# Altium PCB Schémas suiveur ligne.PcbDoc
Units mm, origin at the board's own origin, x right, y up, seen from the top; angles counter-clockwise.
Board outline 36 x 51 mm, 2 copper layers (Top Layer, Bottom Layer); 21 components, 12 nets, 56 pads, 5 vias.
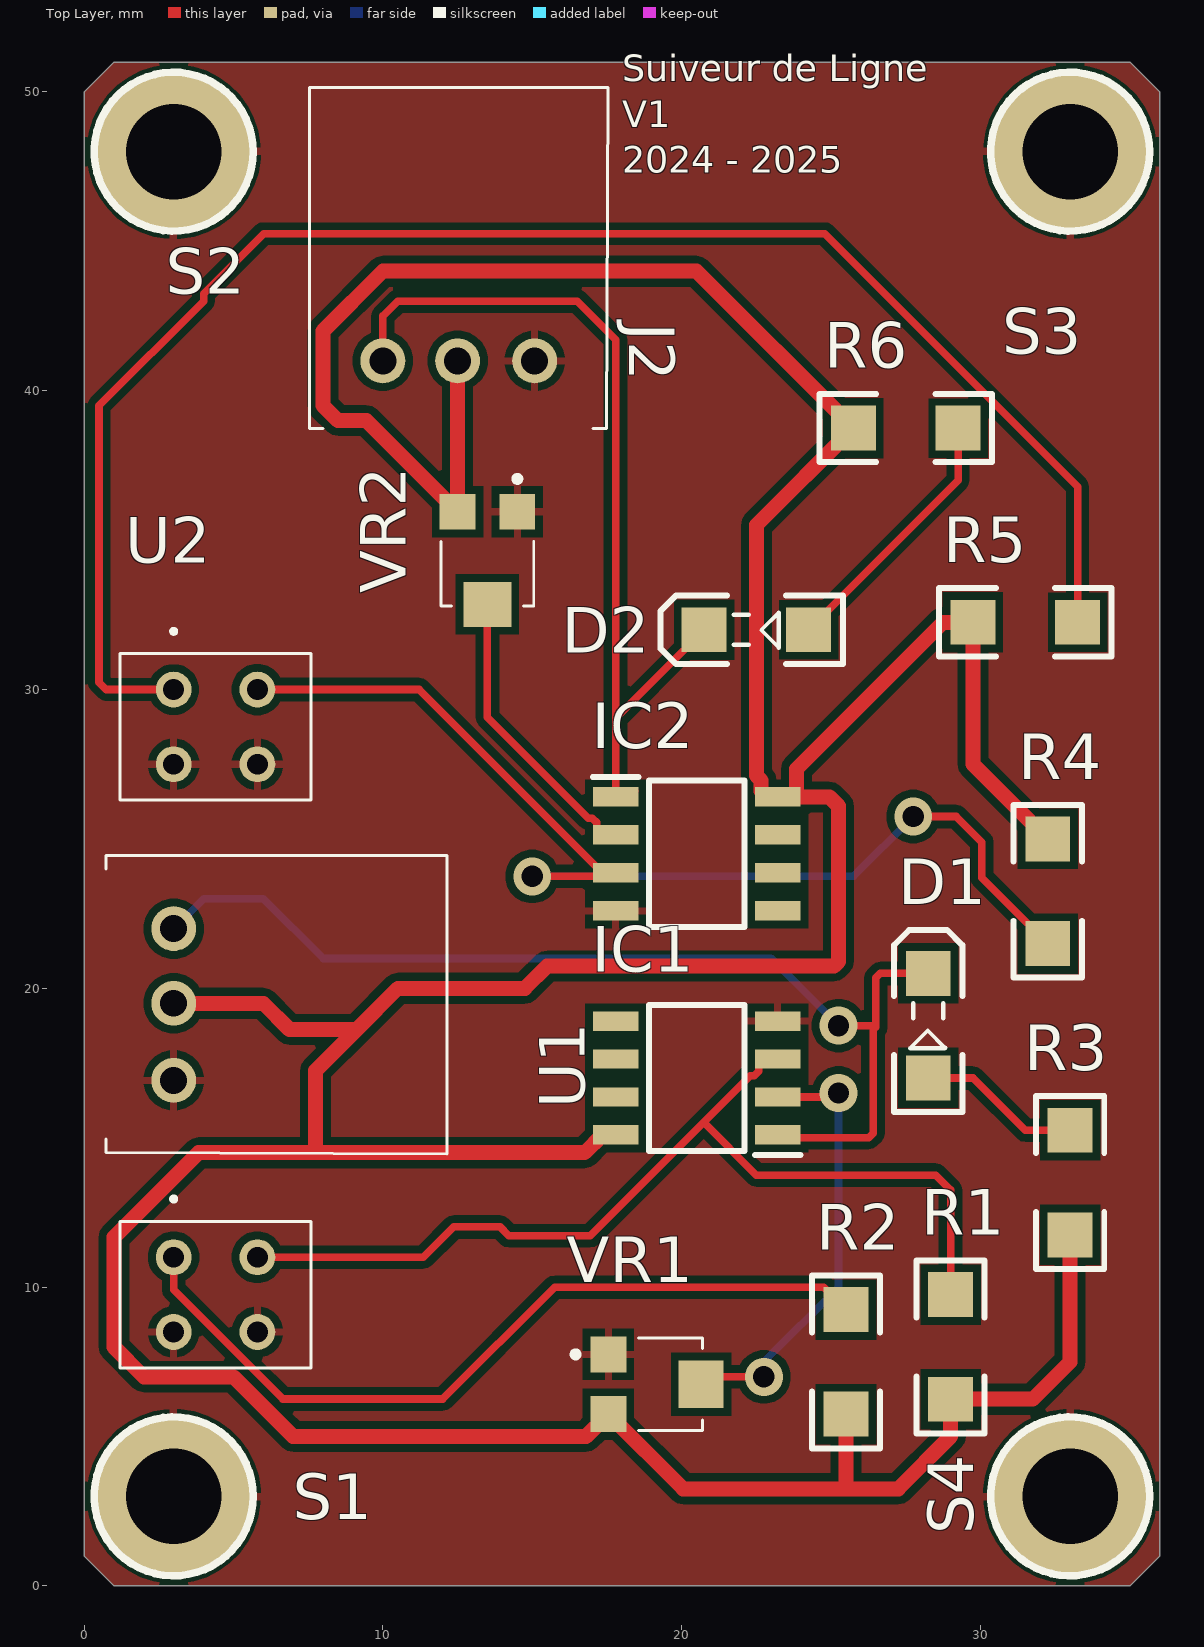
[diagram p0: Top Layer view]
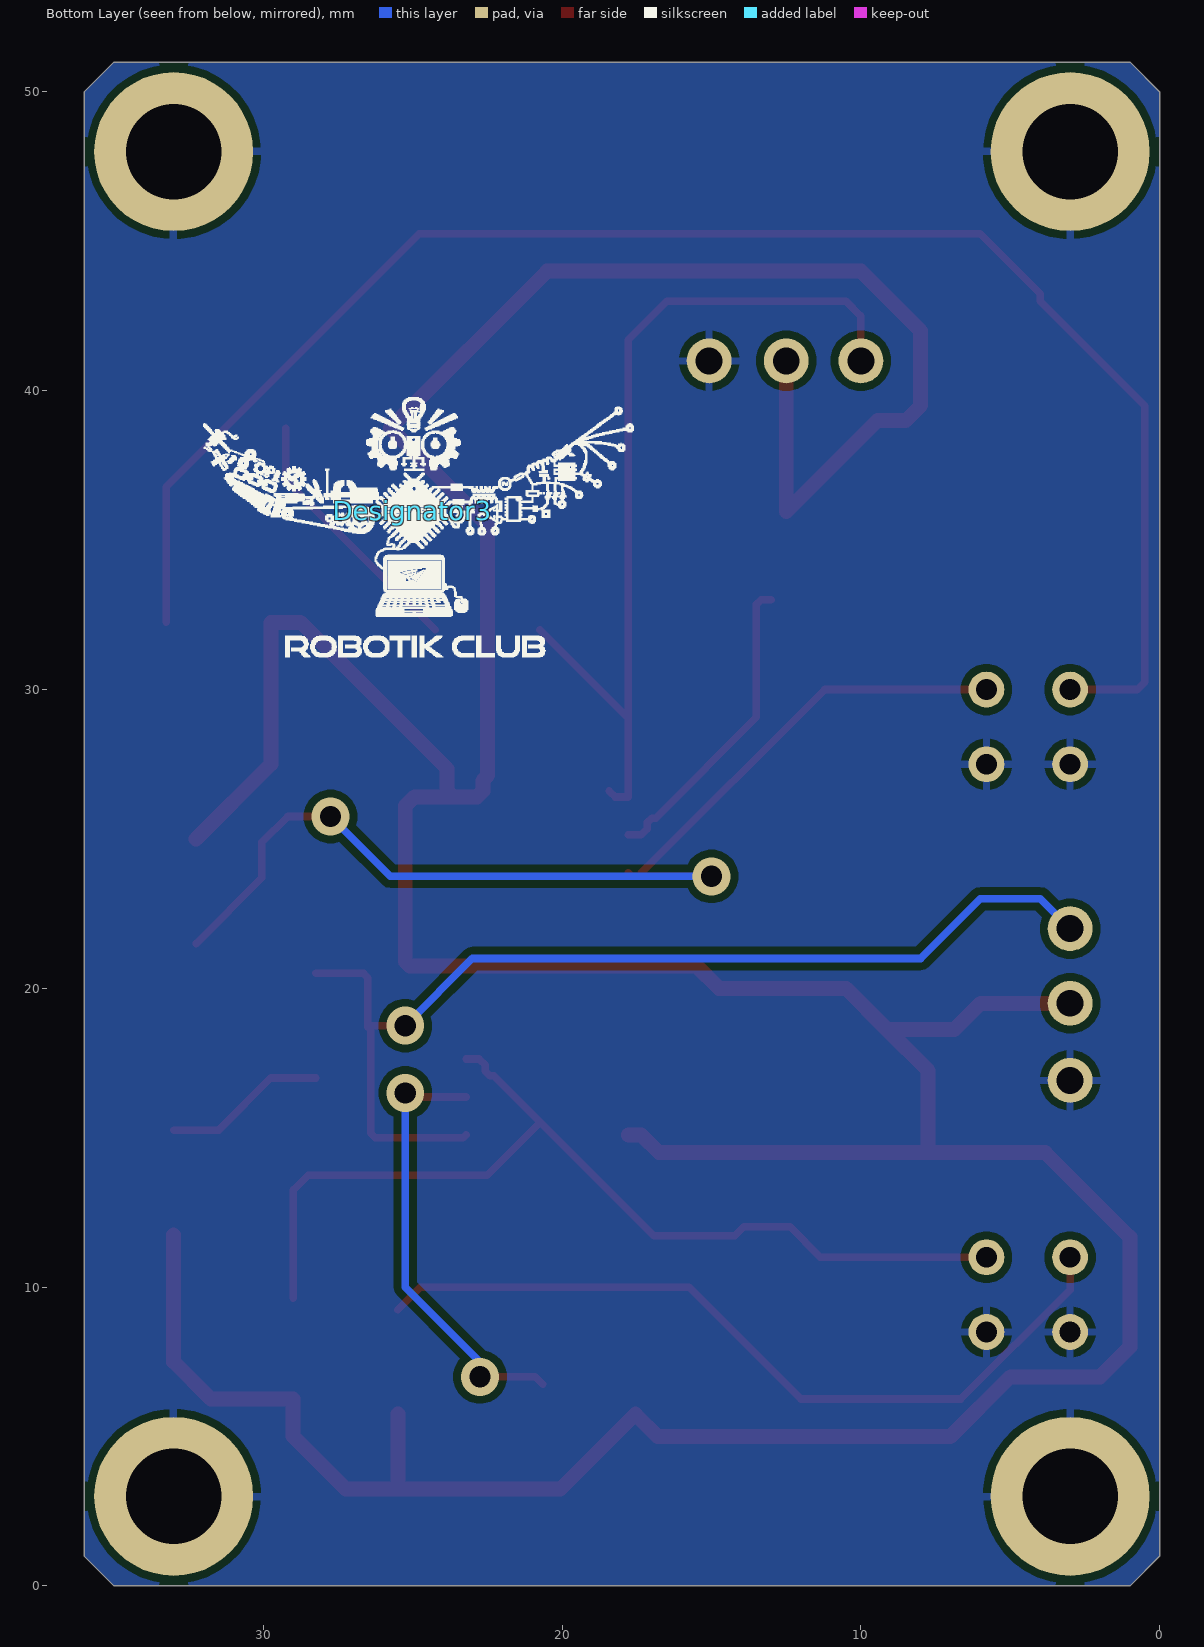
[diagram p1: Bottom Layer view, seen from below]
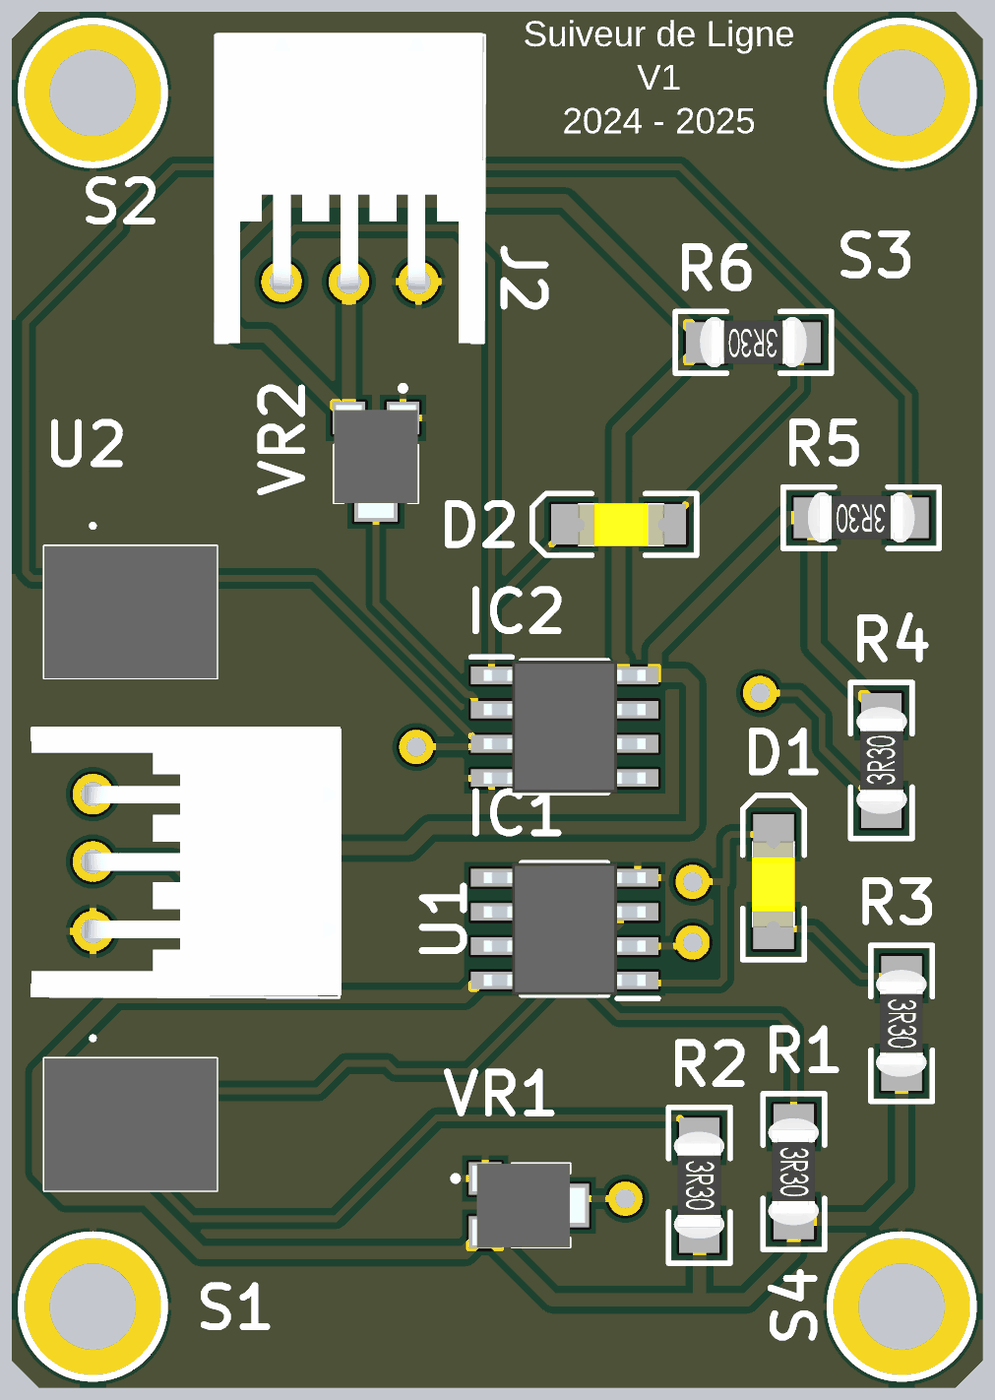
[diagram p2: 3D render of the assembled board from above, using the file's embedded part models]

## Layer stack, top to bottom
Top Solder: solder mask 0.0102, Solder Resist, Dk 3.5
Top Layer: signal copper 0.0356
Dielectric 1: dielectric 0.32, FR-4, Dk 4.8
Bottom Layer: signal copper 0.0356
Bottom Solder: solder mask 0.0102, Solder Resist, Dk 3.5

## Board outline
0,50 1,51 35,51 36,50 36,1 35,0 1,0 0,1

## Design rules (kind name [scope] priority, off if disabled: settings)
Clearance [All] p1: gap=0.254 ignorepadtopadclearanceinfootprint=FALSE
PolygonConnect [All] p1: connectstyle=Relief reliefconductorwidth=0.254 reliefentries=4 polygonreliefangle="90 Angle" airgapwidth=0.254
RoutingVias [All] p1: holewidth=0.711 width=1.27 viastyle="Through Hole" minholewidth=0.711 minwidth=1.27 maxholewidth=0.711 maxwidth=1.27
SolderMaskExpansion [All] p1: expansion=0.102 istentingtop=FALSE
SupplyNets "Schematic Supply Nets_2" [InNet('vcc 2 +')] p1: voltage=0.000
SupplyNets "Schematic Supply Nets" [InNet('GND')] p2: voltage=0.000
Width [All] p1: maxlimit=0.5 minlimit=0.254 preferedwidth=0.254 minimp=50.000000 maximp=50.000000 favimp=50.000000
30 further rules are at their usual default settings.

## Classes and differential pairs
component class "Schémas suiveur ligne": D1 D2 IC1 IC2 J2 R1 R2 R3 R4 R5 R6 S1 S2 S3 S4 U1 VR1

## Components (designator, comment, footprint, x,y, rotation, side; value= is the part's Value field where it differs from the comment)
D1 "LED1" KP-3216SEC 28.25,18.75 r90 top
D2 "LED1" KP-3216SEC 22.5,32 r180 top
Designator3 "Comment" Logo_lowres 25,36 r180 bottom
IC1 "LM358AWDT" SOIC127P600X175-8N 20.5,17 r180 top
IC2 "LM358AWDT" SOIC127P600X175-8N 20.5,24.5 r0 top
J1 "S3B-XH-A-1_LF__SN_" S3B-XH-A 3,22 r270 top
J2 "S3B-XH-A-1_LF__SN_" S3B-XH-A 10,41 r0 top
R1 "" "Resistor 1206" 29,8 r270 top value=22K
R2 "" "Resistor 1206" 25.5,7.5 r270 top value=100
R3 "" "Resistor 1206" 33,13.5 r270 top value=10K
R4 "" "Resistor 1206" 32.25,23.25 r90 top value=22K
R5 "" "Resistor 1206" 31.5,32.25 r180 top value=100
R6 "" "Resistor 1206" 27.5,38.75 r180 top value=10K
S1 "Screw M3" "Screw M3" 3,3 r0 top
S2 "Screw M3" "Screw M3" 3,48 r0 top
S3 "Screw M3" "Screw M3" 33,48 r0 top
S4 "Screw M3" "Screw M3" 33,3 r0 top
U1 "RPR-220PC30N" RPR220PC30N 3,11 r0 top
U2 "RPR-220PC30N" RPR220PC30N 3,30 r0 top
VR1 "EVM-3YSX50B53" EVM3YSX50B53 19.25,6.75 r270 top
VR2 "EVM-3YSX50B53" EVM3YSX50B53 13.5,34.25 r180 top

## Footprints (in the part's own frame and the unit in brackets; to place one, negate y for a bottom-side part, rotate by r counter-clockwise, add the part's x,y. Pads: shape width x height; smd on the part's side, far side on the other; paste and mask are expansions set on the pad)
EVM3YSX50B53 [mm]
  rect 1.2x1.2 smd: A1(-1,-1.7) C1(1,-1.7)
  rect 1.6x1.5 smd: B1(0,1.4)
  silkscreen extent -1.55,-2.9 1.55,1.45, body extent -1.55,-2.18 1.55,2, height 1.65
KP-3216SEC [mm]
  rect 1.5x1.5 smd: 1(-1.75,0) 2(1.75,0)
  silkscreen extent -2.89,-1.14 3.2,1.14, body extent -1.7,-0.79 1.5,0.81, height 1.1
Logo_lowres [mm]
  silkscreen extent -7.01,-4.93 7.39,3.76
"Resistor 1206" [mm]
  rect 1.5x1.5 smd: 1(-1.75,0) 2(1.75,0)
  silkscreen extent -2.89,-1.14 2.89,1.14, body extent -1.98,-0.95 1.98,0.93, height 0.55
RPR220PC30N [mm]
  round 1.2 hole 0.7: 1(0,0) 2(0,-2.5) 3(2.8,-2.5) 4(2.8,0)
  silkscreen extent -1.8,-3.7 4.6,2, body extent -1.8,-3.7 4.6,1.2, height 6.6
S3B-XH-A [mm]
  round 1.5 hole 0.9: 1(0,0) 2(2.5,0) 3(5.08,0)
  silkscreen extent -2.45,-2.26 7.54,9.14, body extent -2.44,-2.27 7.46,9.23, height 6.15
"Screw M3" [mm] "M3 iso Screw"
  round 5.32 hole 3.2 unplated: 0(0,0)
  silkscreen extent -2.66,-2.66 2.66,2.66
SOIC127P600X175-8N [mm]
  rect 1.525x0.65 smd: 1(-2.712,1.905) 2(-2.712,0.635) 3(-2.712,-0.635) 4(-2.712,-1.905) 5(2.712,-1.905) 6(2.712,-0.635) 7(2.712,0.635) 8(2.712,1.905)
  silkscreen extent -3.47,-2.45 1.6,2.58, body extent -3,-2.45 3,2.45, height 1.75

## Part data
D1 D2: "Typical RED GaAs LED", LatestRevisionDate=08-Jul-2005, LatestRevisionNote="Mech Layer 1 removed.", PackageDescription="LED; 2 Leads", PackageReference=LED-1, Published=8-Jun-2000, Publisher="Altium Limited"
IC1 IC2: "Integrated Circuit", Manufacturer_Name=STMicroelectronics, Mouser Part Number=511-LM358AWDT, Arrow Part Number=LM358AWDT, Arrow Price/Stock=https://www.arrow.com/en/products/lm358awdt/stmicroelectronics?region=nac, Datasheet Link=https://www.st.com/resource/en/datasheet/lm158w.pdf, Height=1.75mm, Manufacturer_Part_Number=LM358AWDT, Mouser Price/Stock=https://www.mouser.co.uk/ProductDetail/STMicroelectronics/LM358AWDT?qs=Ok1pvOkw6%2FqiXfQzFpuZ5Q%3D%3D
J1 J2: "Connector", Arrow Part Number=S3B-XH-A-1(LF)(SN), Manufacturer_Name="JST Sales America", Datasheet Link=http://www.jst-mfg.com/product/pdf/eng/eXH.pdf?5de523f84a15d, Height=6.1mm, Manufacturer_Part_Number=S3B-XH-A-1(LF)(SN)
R1 R2 R3 R4 R5 R6: library part Res2, "Resistor", LatestRevisionDate=17-Jul-2002, LatestRevisionNote="Re-released for DXP Platform.", PackageDescription="Axial Device, Thru-Hole; 2 Leads; 0.4 in Pin Spacing", PackageReference=AXIAL-0.4, Published=8-Jun-2000, Publisher="Altium Limited"
U1 U2: "Undefined or Miscellaneous", Manufacturer_Name="ROHM Semiconductor", Mouser Part Number=755-RPR-220PC30N, Arrow Part Number=RPR-220PC30N, Arrow Price/Stock=https://www.arrow.com/en/products/rpr-220pc30n/rohm-semiconductor, Datasheet Link=http://rohmfs.rohm.com/en/products/databook/datasheet/opto/optical_sensor/photosensor/rpr-220pc30n.pdf, Height=6.5mm, Manufacturer_Part_Number=RPR-220PC30N, Mouser Price/Stock=https://www.mouser.co.uk/ProductDetail/ROHM-Semiconductor/RPR-220PC30N?qs=U%2FDGNQcZ28ppQpuQ5bm7oA%3D%3D
VR1 VR2: "Variable Resistor", Manufacturer_Name=Panasonic, Mouser Part Number=667-EVM-3YSX50B53, Arrow Part Number=EVM-3YSX50B53, Arrow Price/Stock=https://www.arrow.com/en/products/evm-3ysx50b53/panasonic, Datasheet Link=https://datasheet.datasheetarchive.com/originals/distributors/Datasheets_SAMA/06485c698e59114aa7d87e0e45252d0d.pdf, Height=1.55mm, Manufacturer_Part_Number=EVM-3YSX50B53, Mouser Price/Stock=https://www.mouser.com/Search/Refine.aspx?Keyword=667-EVM-3YSX50B53

## Via types
v1: diameter 1.27, hole 0.711, Top Layer to Bottom Layer, 5 vias

## Nets (pads, with @x,y where several pads share a name; then routed paths per layer and width w, separated by ;. In a path a pad name is that pad's centre, name@x,y a point inside that pad or via, vN(x,y) a via of type N, cw(c..) or ccw(c..) an arc to the next point about the centre after c; other vN are vias at no path point)
"ali 2 input +": IC2.3 R4.1 U2.4 | length 37.6
  Top Layer w0.254: U2.4@5.656,30 11.215,30 IC2.3@17.35,23.865 ; v1(15,23.75) 17.673,23.75 IC2.3 ; v1(27.75,25.75) 29.187,25.75 30.048,24.889 30.048,23.702 R4.1
  Bottom Layer w0.254: v1(15,23.75) 25.75,23.75 v1(27.75,25.75)
"ali 2 input -": IC2.2 VR2.B1 | length 10.4
  Top Layer w0.254: VR2.B1@13,33 13.342,33 VR2.B1@13.496,32.846 ; VR2.B1 13.5,29.067 16.868,25.699 17.004,25.699 17.152,25.55 17.152,25.333 17.35,25.135 IC2.2
"ali 2 output": D2.2 IC2.1 J2.1 | length 30.2
  Top Layer w0.254: J2.1 10,42.5 10.5,43 16.5,43 17.788,41.712 17.788,29.038 ; IC2.1@18.423,26.603 18.225,26.405 IC2.1 17.788,29.038 ; D2.2 17.788,29.038
"ali input +": IC1.3 R1.1 U1.4 | length 33.4
  Top Layer w0.254: U1.4 11.355,11 12.371,12.016 13.921,12.016 14.218,11.718 16.939,11.718 20.735,15.515 ; IC1.3 22.775,17.635 22.577,17.437 22.577,17.22 22.428,17.071 22.292,17.071 20.735,15.515 ; R1.1@29,9.623 29,13.25 28.5,13.75 22.5,13.75 20.735,15.515
"ali input -": IC1.2 VR1.B1 | length 14.8
  Top Layer w0.254: VR1.B1 20.9,7 v1(22.75,7) ; IC1.2 25.115,16.365 v1(25.25,16.5)
  Bottom Layer w0.254: v1(22.75,7) 22.75,7.5 25.25,10 v1(25.25,16.5)
"ali output": D1.2 IC1.1 J1.1 | length 35.9
  Top Layer w0.254: IC1.1 23.307,15 26.256,15 26.405,15.149 26.405,18.75 v1(25.25,18.75) ; 26.5,18.691 26.5,20.351 26.649,20.5 D1.2
  Bottom Layer w0.254: J1.1 4,23 6,23 8,21 23,21 v1(25.25,18.75)
GND: IC1.4 IC2.4 J1.3 J2.3 S1.0 S2.0 S3.0 S4.0 U1.2 U1.3 U2.2 U2.3 VR1.A1 VR2.A1
NetD1_1: D1.1 R3.1 | length 5.5
  Top Layer w0.254: D1.1 29.75,17 31.5,15.25 R3.1
NetD2_1: D2.1 R6.1 | length 8.8
  Top Layer w0.254: D2.1 29.25,37 R6.1
NetR2_1: R2.1 U1.1 | length 27
  Top Layer w0.254: U1.1 3,9.913 6.655,6.258 12.008,6.258 15.75,10 24.75,10 R2.1
NetR5_1: R5.1 U2.1 | length 54.7
  Top Layer w0.254: U2.1@2.5,30 0.75,30 0.5,30.25 0.5,39.5 4,43 4,43.25 6.008,45.258 24.781,45.258 33.25,36.789 R5.1
"vcc 2 +": IC1.8 IC2.8 J1.2 J2.2 R1.2 R2.2 R3.2 R4.2 R5.2 R6.2 VR1.C1 VR2.C1 | length 167.1
  Top Layer w0.5: J1.2 6,19.5 6.875,18.625 9.125,18.625 ; J2.2 VR2.C1 9.45,39 8.5,39 8,39.5 8,42 10,44 20.5,44 R6.2 22.5,35.5 22.5,27.117 22.655,26.962 22.655,26.603 22.853,26.405 IC2.8 IC2.8@23.65,26.405 ; IC1.8 17.35,15.095 16.755,14.499 7.75,14.499 ; R2.2 25.5,3.399 25.351,3.25 ; R4.2 29.75,27.5 R5.2 28.75,32.25 23.848,27.348 23.848,26.603 IC2.8@23.65,26.405 ; R3.2 33,7.5 31.75,6.25 R1.2 29,5 27.25,3.25 25.351,3.25 ; 7.75,14.499 3.827,14.499 1,11.672 1,8 2,7 5,7 7,5 16.8,5 VR1.C1 20.05,3.25 25.351,3.25 ; 7.75,14.499 7.75,17.25 9.125,18.625 ; 9.125,18.625 10.5,20 14.75,20 15.5,20.75 25.101,20.75 25.25,20.899 25.25,26.101 24.946,26.405 IC2.8@23.65,26.405
pads on no net: IC1.5 IC1.6 IC1.7 IC2.5 IC2.6 IC2.7

## Polygon pours and split planes (outlines as drawn)
GND on Top Layer "GND_Top" (solid, pour order 0): 0,50 1,51 35,51 36,50 36,1 35,0 1,0 0,1
GND on Bottom Layer "GND_bottom" (solid, pour order 1): 0,50 1,51 35,51 36,50 36,1 35,0 1,0 0,1

## Silkscreen, mask and mechanical layers (free items; w line width, h text height)
Top Overlay:
  text "Suiveur de Ligne / V1 / 2024 - 2025" at 18.015,47 h1.52
Mechanical 1:
  the board outline again, w0.254